# Altium PCB Relay PCB.PcbDoc
Units mm, origin at the board's own origin, x right, y up, seen from the top; angles counter-clockwise.
Board outline 155.85 x 41.68 mm, 2 copper layers (Top Layer, Bottom Layer); 45 components, 34 nets, 121 pads, 14 vias.
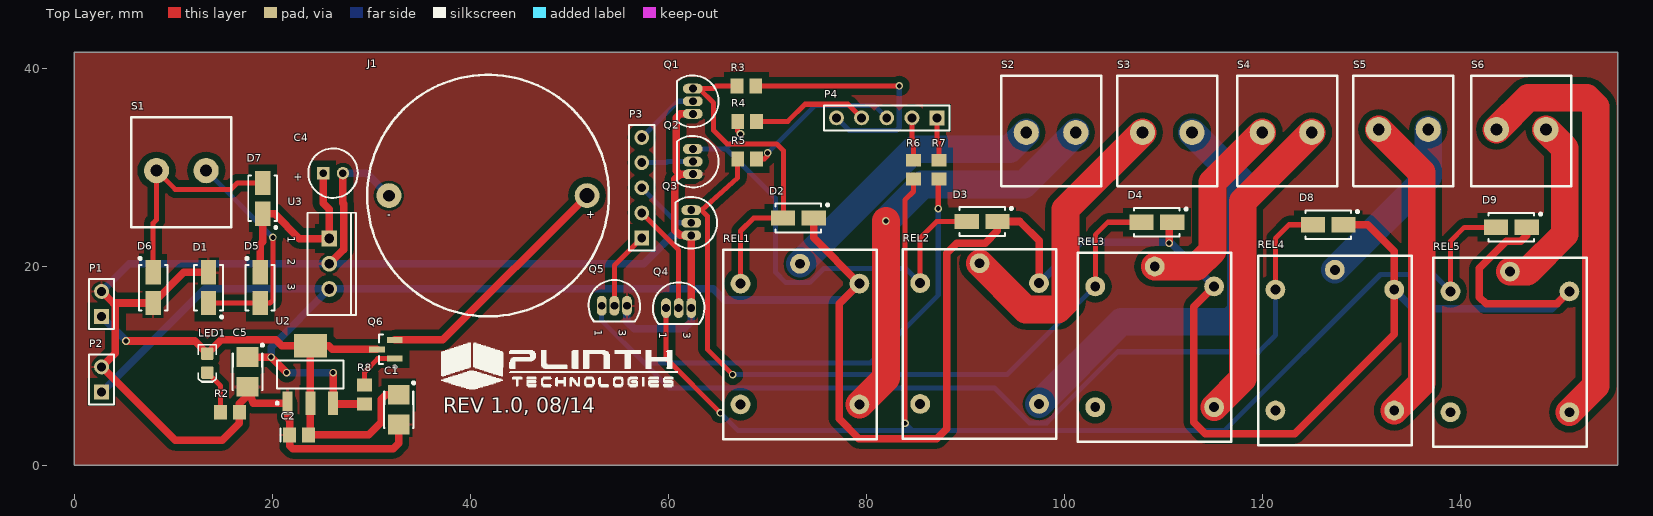
[diagram p0: Top Layer view]
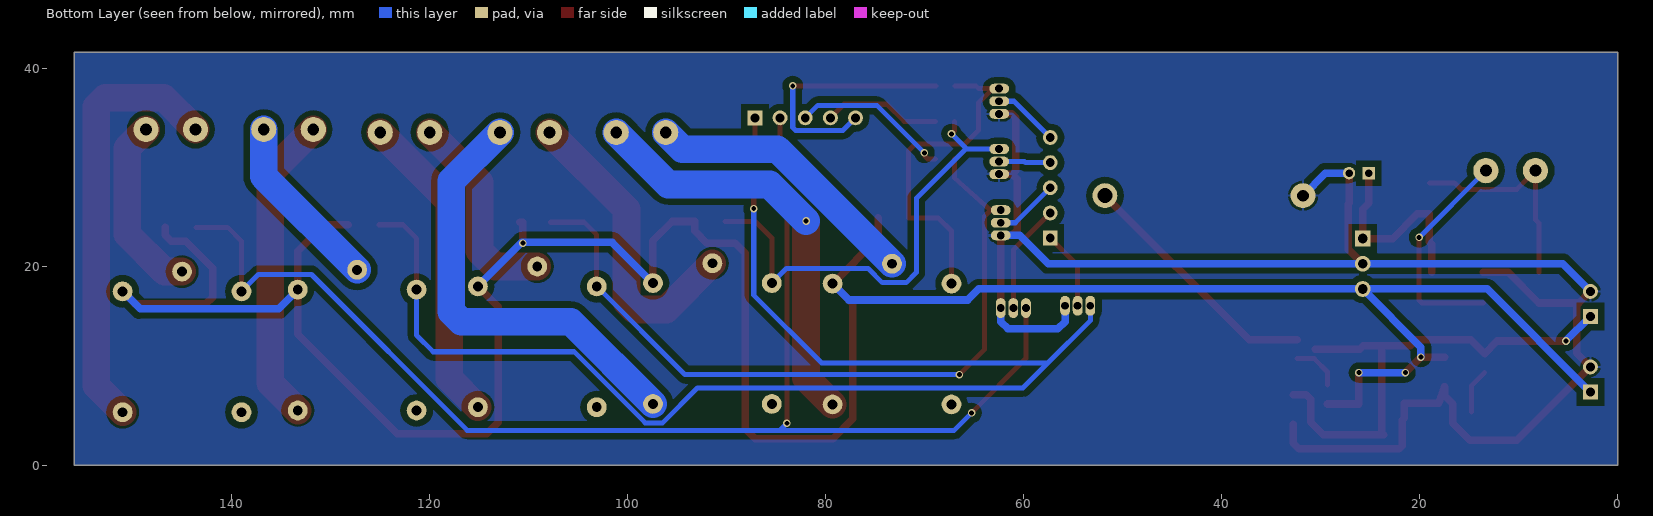
[diagram p1: Bottom Layer view, seen from below]

## Layer stack, top to bottom
Top Solder: solder mask 0.0102, Solder Resist, Dk 3.5
Top Layer: signal copper 0.0356
Dielectric1: dielectric 0.32, FR-4, Dk 4.8
Bottom Layer: signal copper 0.0356
Bottom Solder: solder mask 0.0102, Solder Resist, Dk 3.5

## Board outline
0,0 0,41.681 155.854,41.681 155.854,0 0,0

## Design rules (kind name [scope] priority, off if disabled: settings)
Clearance "Polygon Clearance" [InPolygon] p1: gap=0.635
Clearance [All] p2: gap=0.254
PolygonConnect [All] p1: connectstyle=Relief reliefconductorwidth=0.254 reliefentries=4 polygonreliefangle="90 Angle" airgapwidth=0.254
RoomDefinition "Relay PCB" [InComponentClass('Relay PCB')] p1: confinementstyle=ConfineIn formatcopy=TRUE lockcomponents=TRUE outline 0,0 155.854,0 155.854,41.681 0,41.681
RoutingVias [All] p1: holewidth=0.5 width=0.762 viastyle="Through Hole" minholewidth=0.5 minwidth=0.762 maxholewidth=0.5 maxwidth=0.762
SolderMaskExpansion [All] p1: expansion=0.102
UnpouredPolygon [All] p1: allowunpoured=FALSE
Width AC [InNet('NO1','NO2','NO3','NO4','NO5','SW1','SW2','SW3','SW4','SW5')] p1: maxlimit=3.81 minlimit=0.254 preferedwidth=2.794
Width Power [InNet('12DC','GND','VIN','VOUT','BAT_CON')] p2: maxlimit=0.762 minlimit=0.254 preferedwidth=0.762
Width "All Other" [All] p3: maxlimit=0.762 minlimit=0.254 preferedwidth=0.508
29 further rules are at their usual default settings.

## Components (designator, comment, footprint, x,y, rotation, side; value= is the part's Value field where it differs from the comment)
C1 "10uF" B 32.766,5.588 r270 top
C2 "0.1uF" 0805 22.708,3.048 r0 top
C4 "10uF" CAPPR2-5x6.8 26.137,29.464 r0 top
C5 "10uF" B 17.501,9.398 r270 top
D1 "1N4007(M7)" "1N4007 (M7)" 13.564,17.907 r270 top
D2 "1N4007(M7)" "1N4007 (M7)" 73.127,24.943 r0 top
D3 "1N4007(M7)" "1N4007 (M7)" 91.669,24.587 r0 top
D4 "1N4007(M7)" "1N4007 (M7)" 109.322,24.511 r0 top
D5 "1N4007(M7)" "1N4007 (M7)" 18.771,17.907 r90 top
D6 "1N4007(M7)" "1N4007 (M7)" 7.976,17.907 r90 top
D7 "1N4007(M7)" "1N4007 (M7)" 19.025,26.924 r270 top
D8 "1N4007(M7)" "1N4007 (M7)" 126.619,24.257 r0 top
D9 "1N4007(M7)" "1N4007 (M7)" 145.11,24.003 r0 top
J1 "Battery Holder" "Battery Holder" 41.783,27.203 r0 top
LED1 "" LED-0805-K 13.437,10.287 r270 top
P1 "Header 2" HDR1X2 2.769,14.986 r90 top
P2 "Header 2" HDR1X2 2.769,7.366 r90 top
P3 "Header 5" HDR1X5 57.302,22.911 r90 top
P4 "Header 5" HDR1X5 87.122,35.052 r180 top
Q1 "BC547B" 29-04 62.459,36.728 r180 top
Q2 "BC547B" 29-04 62.459,30.632 r180 top
Q3 "BC547B" 29-04 62.306,24.46 r180 top
Q4 "BC547B" 29-04 61.036,15.85 r270 top
Q5 "BC547B" 29-04 54.534,16.078 r270 top
Q6 "Si2323" "Si2323 PMOS" 31.471,11.684 r180 top
R2 "47E" ERA-0805 15.723,5.334 r0 top
R3 "1K" ERA-0805 67.869,38.278 r180 top
R4 "1K" ERA-0805 67.945,34.696 r180 top
R5 "1K" ERA-0805 67.945,30.912 r180 top
R6 "1K" ERA-0805 84.734,29.82 r270 top
R7 "1K" ERA-0805 87.3,29.82 r270 top
R8 "10K" ERA-0805 29.312,7.112 r90 top
REL1 "Relay" Relay 65.532,21.717 r270 top
REL2 "Relay" Relay 83.668,21.768 r270 top
REL3 "Relay" Relay 101.346,21.438 r270 top
REL4 "Relay" Relay 119.532,21.107 r270 top
REL5 "Relay" Relay 137.211,20.93 r270 top
S1 "Screw Terminal" "Screw Terminal" 13.31,29.718 r180 top
S2 "Screw Terminal" "Screw Terminal" 96.139,33.579 r0 top
S3 "Screw Terminal" "Screw Terminal" 107.874,33.579 r0 top
S4 "Screw Terminal" "Screw Terminal" 119.964,33.579 r0 top
S5 "Screw Terminal" "Screw Terminal" 136.703,33.884 r180 top
S6 "Screw Terminal" "Screw Terminal" 148.59,33.884 r180 top
U2 "LM1117MP-3.3" MP04A_N 23.851,9.144 r90 top
U3 "MC7812CT" 221A-04 25.756,20.32 r270 top

## Footprints (in the part's own frame and the unit in brackets; to place one, negate y for a bottom-side part, rotate by r counter-clockwise, add the part's x,y. Pads: shape width x height; smd on the part's side, far side on the other; paste and mask are expansions set on the pad)
"1N4007 (M7)" [mm] "Molded Diode, 2-Leads, Body 4.30x2.70mm, IPC Medium Density"
  rect 2.45x1.55 smd: 1(-1.55,0) 2(1.55,0)
  silkscreen extent -2.3,-1.45 3.07,1.45, body extent -2.3,-1.45 2.3,1.45, height 2.44
29-04 [mm] "TO, Flat Index; 3 In-Line, Axial Leads; Body Dia. 4.8mm; Leads 0.48 x 0.5 mm (max)"
  oval 2x1 hole 0.8: 1(0,-1.27) 2(0,0) 3(0,1.27)
  silkscreen extent -2.6,-2.6 1.6,2.6
221A-04 [mm] "TO, Thru-Hole, Vertical, Heatsink Mounted; 3 In-Line Leads; Pitch 2.54 mm"
  rect 1.6x1.6 hole 1: 1(-2.54,0)
  round 1.6 hole 1: 2(0,0) 3(2.54,0)
  silkscreen extent -5.15,-2.2 5.15,2.7
0805 [mm] "Chip Capacitor; Body 2.0 x 1.2 mm (LxW typ)"
  rect 1.3x1.5 smd: 1(-0.95,0) 2(0.95,0)
  silkscreen extent -1.9,-0.65 -1.9,0.65
B [mm] "Capacitor, SM Tantalum; Body 3.5 x 2.8 mm (LxW typ)"
  rect 2x2.2 smd: 1(-1.5,0) 2(1.5,0)
  silkscreen extent -2.82,-1.5 1.85,1.63
"Battery Holder" [mm]
  round 2.5 hole 1.5: 1(10,0)
  round 2.5 hole 1.17: 2(-10,0)
  silkscreen extent -12.2,-12.2 12.2,12.2, body extent -12.19,-12.19 12.11,12.16, height 6.8
CAPPR2-5x6.8 [mm] "Capacitor, Electrolytic, Radial; Body 5 x 6.8 mm (Dia.xH typ); Pin Spacing 2 mm (typ)"
  rect 1.25x1.25 hole 0.75: 1(-1,0)
  round 1.25 hole 0.75: 2(1,0)
  silkscreen extent -2.5,-2.5 2.5,2.5
ERA-0805 [mm] "Chip Resistor; Body 2 x 1.3 mm (LxW typ)"
  rect 1.3x1.5 smd: 1(-0.95,0) 2(0.95,0)
HDR1X2 [mm] "Connector; Header; 2 Position"
  rect 1.5x1.5 hole 0.9: 1(0,0)
  round 1.5 hole 0.9: 2(2.54,0)
  silkscreen extent -1.27,-1.27 3.81,1.27
HDR1X5 [mm] "Connector; Header; 5 Position"
  rect 1.5x1.5 hole 0.9: 1(0,0)
  round 1.5 hole 0.9: 2(2.54,0) 3(5.08,0) 4(7.62,0) 5(10.16,0)
  silkscreen extent -1.27,-1.27 11.43,1.27
LED-0805-K [mil]
  round 20 on Mech15: 0(0,0)
  rrect25% 50x50 smd: A(-37.5,0) K(37.5,0)
  Top Layer pour cut-out: -15,30 15,30 15,-30 -15,-30
  silkscreen extent -72,-35 77,35, body extent -39,-25 39,25, height 31
MP04A_N [mm] "SOT223, 4-Leads, Body 6.5x3.5mm, Pitch 2.3mm, Lead Span 7mm, IPC Medium Density"
  rect 2.4x1 smd: 1(-2.9,2.3) 2(-2.9,0) 3(-2.9,-2.3)
  rect 2.4x3.3 smd: 4(2.9,0)
  silkscreen extent -3.02,-3.35 1.4,3.47, body extent -1.85,-3.35 1.85,3.35, height 1.8
Relay [mm] "6 V to 24 V"
  round 2 hole 1: 1(3.4,13.75) 2(3.4,1.75) 3(1.4,7.75) 4(15.6,1.75) 5(15.6,13.75)
  silkscreen extent 0,0 19.1,15.5
"Screw Terminal" [mm]
  round 2.54 hole 1.2: 1(-0.011,0) 2(4.989,0)
  silkscreen extent -2.54,-5.41 7.54,5.72
"Si2323 PMOS" [mm] "SOT23, 3-Leads, Body 2.92x2.37mm, Pitch 0.95mm, IPC Medium Density"
  rect 1.6x0.6 smd: 1(-0.9,0.95) 2(-0.9,-0.95) 3(0.9,0)
  silkscreen extent -1.03,-1.5 0.7,1.92, body extent -0.7,-1.52 0.7,1.52, height 1.12

## Part data
C1 C5: library part T491B, "Solid Tantalum Chip Capacitor, Standard T491 Series - Industrial Grade"
C2: library part C0805, "Ceramic Chip Capacitor - Standard"
C4: library part "Cap Pol1", "Polarized Capacitor (Radial)"
LED1: library part LED_SMD_Green_0805_6mcd, "LED, 0805 SMD, Green"
P1 P2: "Header, 2-Pin"
P3 P4: "Header, 5-Pin"
Q1 Q2 Q3 Q4 Q5: "Amplifier Transistor NPN Silicon"
R2 R3 R4 R5 R6 R7 R8: library part ERA6Y, "Rectangular Thick Film Chip Resistor, 10 Ohm to 1M Ohm Range, 0.1% and 0.5% Tolerance, 0805 Size, 0.1 W"
U2: "800mA Low-Dropout Linear Regulator"
U3: "3-Terminal Positive Fixed Voltage Regulator"

## Via types
v1: diameter 0.762, hole 0.5, Top Layer to Bottom Layer, 14 vias

## Nets (pads, with @x,y where several pads share a name; then routed paths per layer and width w, separated by ;. In a path a pad name is that pad's centre, name@x,y a point inside that pad or via, vN(x,y) a via of type N, cw(c..) or ccw(c..) an arc to the next point about the centre after c; other vN are vias at no path point)
12DC: C4.1 D5.2 D7.2 U3.1 | length 20.7
  Top Layer w0.762: D5.2 18.771,22.276 19.025,22.53 D7.2 20.232,25.374 22.746,22.86 U3.1 25.756,25.832 25.137,26.451 C4.1
12N: D6.2 D7.1 S1.2 | length 22.1
  Top Layer w0.508: D6.2 7.976,24.409 8.32,24.754 S1.2 10.2,27.838 15.842,27.838 16.478,28.474 D7.1
12P: D1.2 D5.1 S1.1 | length 22.5
  Top Layer w0.508: D1.2 D5.1 19.779,16.357 20.058,16.636 v1(20.058,22.98)
  Bottom Layer w0.508: S1.1 v1(20.058,22.98)
BAT_CON: J1.1 Q6.2 | length 25.4
  Top Layer w0.762: Q6.2 37.214,12.634 J1.1
GND: C1.2 C2.1 C4.2 C5.2 D1.1 D6.1 J1.2 P1.2 P2.2 Q1.3 Q2.3 Q3.3 Q4.3 Q5.3 R2.2 U2.1 U3.2 | length 175.6
  Top Layer w0.762: P1.2 3.938,16.357 ; D1.1 11.076,19.457 D6.1 3.938,16.357 ; U3.2 27.196,21.76 27.196,26.357 27.137,26.416 C4.2 ; C1.2 32.766,2.192 32.225,1.651 22.065,1.651 21.758,1.958 C2.1 21.758,4.521 21.551,4.728 U2.1 18.08,6.244 C5.2 17.501,7.026 16.673,6.198 R2.2 16.673,4.209 14.953,2.489 10.185,2.489 P2.2 4.158,11.295 4.158,16.137 3.938,16.357 ; Q4.3 Q3.3 61.181,23.19 60.648,23.724 60.648,28.829 61.181,29.362 ; Q2.3 61.181,29.362 ; Q1.3 61.181,35.458 60.8,35.077 60.8,29.718 61.156,29.362 61.181,29.362
  Bottom Layer w0.762: P1.2 5.563,20.32 U3.2 57.498,20.32 60.368,23.19 Q3.3 ; C4.2 29.522,29.464 J1.2 ; Q5.3 55.804,14.478 56.54,13.741 61.57,13.741 62.306,14.478 Q4.3
LED1: P4.5 R3.1 | length 25.7
  Top Layer w0.508: R3.1 v1(83.304,38.278)
  Bottom Layer w0.508: P4.5 78.22,33.794 83.025,33.794 83.304,34.073 v1(83.304,38.278)
LED2: P4.4 R4.1 | length 11.9
  Top Layer w0.508: R4.1 72.052,34.696 73.779,36.424 78.13,36.424 P4.4
LED3: P4.3 R5.1 | length 16.1
  Top Layer w0.508: R5.1 69.69,30.912 70.02,31.242 v1(70.02,31.521)
  Bottom Layer w0.508: v1(70.02,31.521) 74.821,36.322 80.772,36.322 P4.3
LED4: P4.2 R6.1 | length 4.3
  Top Layer w0.508: P4.2 84.582,32.969 84.734,32.817 R6.1
LED5: P4.1 R7.1 | length 4.4
  Top Layer w0.508: P4.1 87.122,32.995 87.3,32.817 R7.1
NetD2_1: D2.1 Q1.1 R3.2 REL1.2 | length 34.2
  Top Layer w0.508: Q1.1 Q1.1@63.114,37.998 ; R3.2 64.813,38.278 64.534,37.998 Q1.1@63.114,37.998 ; REL1.2 67.282,23.622 68.603,24.943 D2.1 71.595,24.943 71.595,31.75 70.934,32.411 65.93,32.411 64.541,33.8 64.541,36.571 Q1.1@63.114,37.998
NetD3_1: D3.1 Q2.1 R4.2 REL2.2 | length 50.9
  Top Layer w0.508: R4.2 66.995,33.72 v1(67.277,33.438) ; REL2.2 85.418,22.916 87.089,24.587 D3.1
  Bottom Layer w0.508: v1(67.277,33.438) 65.794,31.955 ; REL2.2 83.948,19.837 75.684,19.837 74.259,18.412 71.849,18.412 70.811,19.45 70.811,26.939 65.794,31.955 ; 65.794,31.955 Q2.1 65.741,31.902 65.794,31.955
NetD4_1: D4.1 Q3.1 R5.2 REL3.2 | length 76.5
  Top Layer w0.508: Q3.1 63.34,25.73 ; v1(66.49,9.119) 63.924,11.684 63.924,25.146 63.34,25.73 ; R5.2 66.995,29.004 63.34,25.73 ; REL3.2 103.096,23.246 104.361,24.511 D4.1
  Bottom Layer w0.508: v1(66.49,9.119) 94.177,9.119 REL3.2
NetD8_1: D8.1 Q5.1 R7.2 REL4.2 | length 135.9
  Top Layer w0.508: v1(87.241,25.883) 87.241,28.87 R7.2 ; REL4.2 121.282,22.89 122.649,24.257 D8.1
  Bottom Layer w0.508: Q5.1 53.264,14.58 57.531,10.312 ; v1(87.241,25.883) 87.241,17.145 80.409,10.312 57.531,10.312 ; REL4.2 121.282,13.116 119.601,11.435 105.379,11.435 98.207,4.263 96.441,4.263 92.931,7.772 60.071,7.772 57.531,10.312
NetD9_1: D9.1 Q4.1 R6.2 REL5.2 | length 130.8
  Top Layer w0.508: Q4.1 59.766,10.744 v1(65.245,5.265) ; v1(83.889,4.216) 83.889,26.772 84.734,27.617 R6.2 ; REL5.2 138.961,22.606 140.358,24.003 D9.1
  Bottom Layer w0.508: v1(65.245,5.265) 67.01,3.501 84.604,3.501 ; v1(83.889,4.216) 84.604,3.501 ; REL5.2 137.263,19.228 131.895,19.228 116.168,3.501 84.604,3.501
NetLED1_K: LED1.K R2.1 | length 4.6
  Top Layer w0.508: LED1.K 14.773,7.999 R2.1
NetQ6_1: Q6.1 R8.2 | length 4.9
  Top Layer w0.508: R8.2 29.312,9.395 30.65,10.734 Q6.1
NO1: REL1.5 S2.2 | length 42.5
  Top Layer w2.794: REL1.5 81.958,8.793 v1(81.958,24.638)
  Bottom Layer w2.794: v1(81.958,24.638) 85.641,28.321 95.87,28.321 S2.2
NO2: REL2.5 S3.2 | length 44.3
  Bottom Layer w2.794: REL2.5 105.728,14.478 116.756,14.478 117.772,15.494 117.772,28.67 S3.2
NO3: REL3.5 S4.2 | length 31.8
  Top Layer w2.794: REL3.5 117.984,8.725 117.984,26.609 S4.2
NO4: REL5.5 S6.2 | length 43.7
  Top Layer w2.794: S6.2 146.801,37.084 152.723,37.084 153.637,36.17 153.637,8.006 REL5.5
NO5: REL4.5 S5.2 | length 31.3
  Top Layer w2.794: S5.2 136.06,29.537 136.06,8.285 REL4.5
REL1: P3.5 Q1.2 | length 6.7
  Bottom Layer w0.508: P3.5 60.96,36.728 Q1.2
REL2: P3.4 Q2.2 | length 5.2
  Bottom Layer w0.508: P3.4 59.809,30.531 59.911,30.632 Q2.2
REL3: P3.3 Q3.2 | length 6.5
  Bottom Layer w0.508: P3.3 60.833,24.46 Q3.2
REL4: P3.2 Q4.2 | length 11.1
  Top Layer w0.508: P3.2 61.036,21.717 Q4.2
REL5: P3.1 Q5.2 | length 8
  Top Layer w0.508: Q5.2 54.534,20.142 P3.1
SW1: REL1.3 S2.1 | length 28.3
  Bottom Layer w2.794: REL1.3 84.854,31.889 94.438,31.889 S2.1
SW2: REL2.3 S3.1 | length 31.2
  Top Layer w2.794: REL2.3 96.088,15.697 99.281,15.697 100.094,16.51 100.094,25.81 S3.1
SW3: REL3.3 S4.1 | length 20.5
  Top Layer w2.794: REL3.3 113.347,20.038 114.927,21.618 114.927,28.553 S4.1
SW4: REL5.3 S6.1 | length 18.5
  Top Layer w2.794: REL5.3 146.725,19.53 150.487,23.292 150.487,31.997 S6.1
SW5: REL4.3 S5.1 | length 18.1
  Bottom Layer w2.794: REL4.3 136.714,29.139 S5.1
VIN: C5.1 D2.2 D3.2 D4.2 D8.2 D9.2 P2.1 R8.1 REL1.1 REL2.1 REL3.1 REL4.1 REL5.1 U2.3 U3.3 | length 292.8
  Top Layer w0.762: C5.1 v1(19.881,10.898) v1(21.455,9.322) ; v1(26.151,9.322) 26.151,6.162 R8.1 ; D2.2 74.668,24.943 74.668,22.931 REL1.1 77.234,16.269 77.234,4.674 79.24,2.667 87.089,2.667 88.105,3.683 88.105,21.387 89.121,22.403 91.973,22.403 93.219,23.648 D3.2 95.479,24.587 97.418,22.648 REL2.1 ; v1(110.559,22.403) 110.559,24.511 D4.2 ; REL3.1 113.048,15.989 113.048,4.318 114.191,3.175 123.233,3.175 133.282,13.224 REL4.1 133.282,21.581 130.607,24.257 D8.2 ; D9.2 146.66,23.216 146.037,22.593 144.589,22.593 141.877,19.881 141.877,16.954 142.55,16.281 149.713,16.281 REL5.1
  Bottom Layer w0.762: P2.1 13.183,17.78 U3.3 ; v1(19.881,10.898) 19.881,11.905 U3.3 ; v1(21.455,9.322) v1(26.151,9.322) ; REL1.1 77.627,16.662 65.651,16.662 64.534,17.78 U3.3 ; REL2.1 101.554,22.504 110.629,22.504 v1@110.645,22.489 ; v1(110.559,22.403) v1@110.645,22.489 ; REL3.1 v1@110.645,22.489 ; REL4.1 135.216,15.773 149.205,15.773 REL5.1
VOUT: C1.1 C2.2 LED1.A P1.1 Q6.3 U2.2 U2.4 | length 51.5
  Top Layer w0.762: v1(5.232,12.522) 12.154,12.522 LED1.A 14.846,12.649 20.368,12.649 20.973,12.044 U2.4 ; C2.2 C2.2@23.851,3.048 ; Q6.3 26.053,11.684 25.693,12.044 U2.4 ; C1.1 31.463,7.088 31.006,6.631 31.006,4.318 29.736,3.048 C2.2@23.851,3.048 ; C2.2@23.851,3.048 U2.2 U2.4
  Bottom Layer w0.762: P1.1 v1(5.232,12.522)
pads on no net: LED1.0 REL1.4 REL2.4 REL3.4 REL4.4 REL5.4

## Polygon pours and split planes (outlines as drawn)
GND on Bottom Layer "Top Overlay-No Net" (solid, remove dead copper, pour order 4): 0,0 0,41.681 155.854,41.681 155.854,0 0,0
GND on Top Layer "Top Overlay-No Net" (solid, remove dead copper, pour order 6): 0,0 0,41.681 155.854,41.681 155.854,0 0,0

## Silkscreen, mask and mechanical layers (free items; w line width, h text height)
Top Overlay:
  drawing of 505 lines, arcs and shapes, not listed
  text "REV 1.0, 08/14" at 37.262,5.283 h1.52

## Dimensions
0,0 to 155.854,0 on Mechanical 1
0,0 to 0,41.681 on Mechanical 1

## Text inside footprints (layer, text, board x,y; h text height)
C4: Top Overlay "+" at 22.162,28.714 h0.76
J1: Top Overlay "-" at 31.623,24.917 h0.76; Top Overlay "+" at 51.689,24.917 h0.76
Q4: Top Overlay "3" at 61.503,13.429 h0.76 r270; Top Overlay "1" at 59.057,13.429 h0.76 r270
Q5: Top Overlay "3" at 55.001,13.657 h0.76 r270; Top Overlay "1" at 52.555,13.657 h0.76 r270
U3: Top Overlay "1" at 21.581,23.11 h0.76 r270; Top Overlay "2" at 21.581,20.82 h0.76 r270; Top Overlay "3" at 21.581,18.28 h0.76 r270